# EAGLE board v1.4 (EAGLE 6.0)
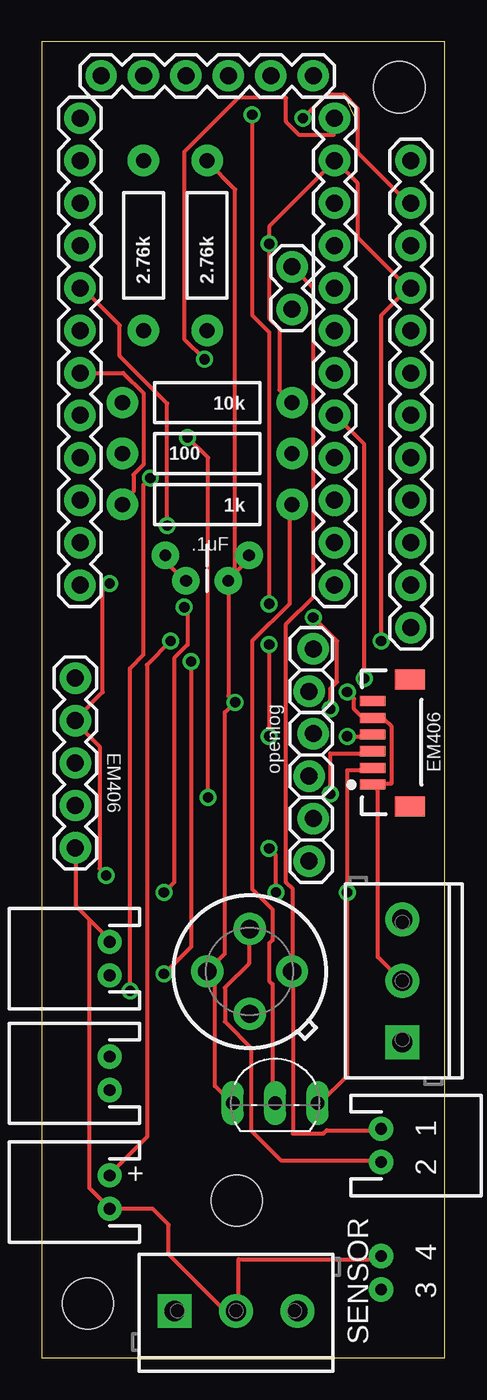
[diagram p0: board, top side]
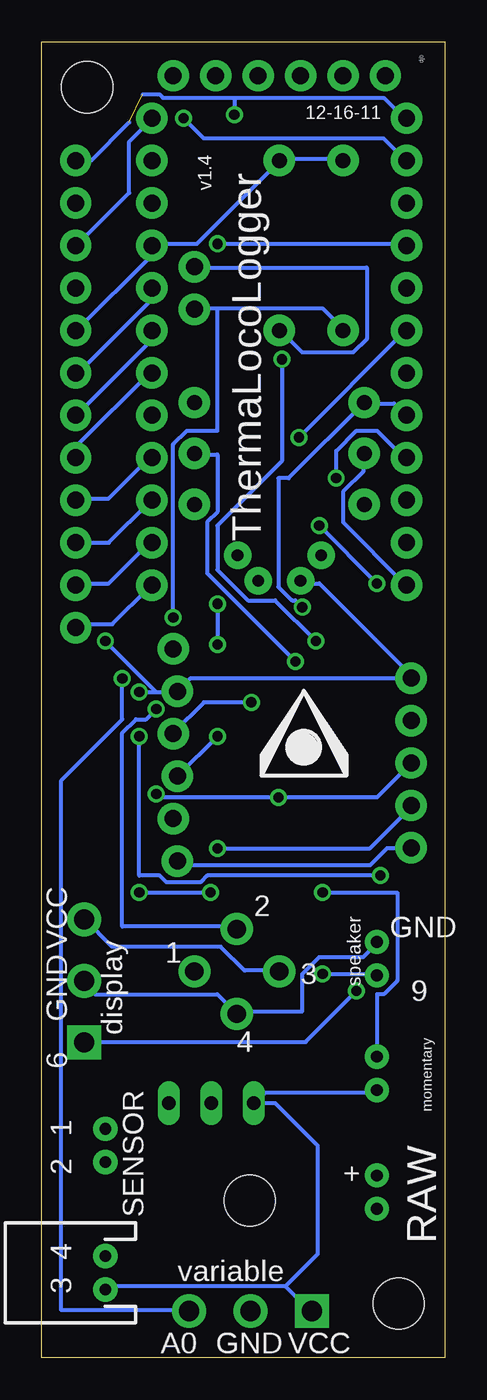
[diagram p1: board, bottom side, seen from below]

Size 24.13 x 78.74 mm. Coordinates in mm from the lower left corner, seen from the top.
Outline: 0,0 24.13,0 24.13,78.74 0,78.74 0,0
Copper layers (1*16): Top 0.035mm / dielectric 1.5mm / Bottom 0.035mm
Design rules: minimum track width 10mil, minimum drill 24mil, track to track 8mil, track to pad 8mil, pad to pad 8mil, via to via 8mil, smd to smd 8mil, copper to edge 40mil, drill to drill 8mil, minimum pad ring 10mil, minimum via ring 8mil, stop-mask expansion 4mil, vias tented up to drill 0mil, thermal gap 10mil

## Footprints (pad centres in the part's own frame; a part is rotated, then mirrored left to right if it is on the bottom)
TO92-EBC = drill 0.813 long: B 0,-1.27; C 2.54,-1.27; E -2.54,-1.27
CAP-PTH-SMALL = drill 0.7 pad 1.651: 1 0,0; 2 2.54,0
CAP-PTH-5MM = drill 0.7 pad 1.651: 1 -2.5,0; 2 2.5,0
SCREWTERMINAL-3.5MM-3_LOCK.007S = drill 1.2 pad 2.032 square: 1 -0.178,0 | drill 1.2 pad 2.032: 2 3.5,0; 3 7.178,0
1X05 = drill 1.016 pad 1.88: 1 0,0; 2 2.54,0; 3 5.08,0; 4 7.62,0; 5 10.16,0
JST-2-PTH = drill 0.7 pad 1.448: 1 -1,0; 2 1,0
1X06 = drill 1.016 pad 1.88: 1 0,0; 2 2.54,0; 3 5.08,0; 4 7.62,0; 5 10.16,0; 6 12.7,0
1X02 = drill 1.016 pad 1.88: 1 0,0; 2 2.54,0
STAND-OFF-TIGHT = hole 3.048: 0,0
1X06_LOCK = drill 1.016 pad 1.88: 1 0,0; 2 2.54,-0.254; 3 5.08,0; 4 7.62,-0.254; 5 10.16,0; 6 12.7,-0.254
1X12 = drill 1.016 pad 1.88: 1 0,0; 2 2.54,0; 3 5.08,0; 4 7.62,0; 5 10.16,0; 6 12.7,0; 7 15.24,0; 8 17.78,0; 9 20.32,0; 10 22.86,0; 11 25.4,0; 12 27.94,0
AXIAL-0.4 = drill 0.9 pad 1.88: P$1 -5.08,0; P$2 5.08,0
TO-39 = drill 1.1 pad 1.93: 1 2.54,0; 2 0,2.54; 3 -2.54,0; 4 0,-2.54
EM406 = smd 0.6 x 1.55: 1 0,0; 2 1,0; 3 2,0; 4 3,0; 5 4,0; 6 5,0 | smd 1.2 x 1.8: P$1 -1.3,-2.225; P$2 6.3,-2.225

## Placement (x,y rotation side)
2N3906  T1  [TO92-EBC]  13.97,16.51 0 top
C1  .1uF  [CAP-PTH-SMALL]  11.18,46.48 180 top
C3  .1u  [CAP-PTH-5MM]  9.91,48.01 180 top
DISPLAY  DSP  [SCREWTERMINAL-3.5MM-3_LOCK.007S]  21.59,19.05 90 top
GPS  EM406  [1X05]  2.01,30.51 90 top
JP1  Power  [JST-2-PTH]  4.06,9.91 90 top
JP2  Variable  [SCREWTERMINAL-3.5MM-3_LOCK.007S]  8.13,2.79 0 top
JP3  Momentary  [JST-2-PTH]  4.06,17.02 90 top
JP4  FTDI  [1X06]  16.26,76.71 180 top
JP5  A4A5  [1X02]  14.99,62.74 90 top
JP6  STAND-OFFTIGHT  [STAND-OFF-TIGHT]  2.77,3.25 0 top
JP7  STAND-OFFTIGHT  [STAND-OFF-TIGHT]  21.41,76.02 0 top
JP8  STAND-OFFTIGHT  [STAND-OFF-TIGHT]  11.68,9.4 90 top
JP10  SPK  [JST-2-PTH]  4.06,23.88 90 top
OPENLOG  OPENLOG  [1X06_LOCK]  16,29.72 90 top
PML  M12PTH  [1X12]  2.29,46.23 90 top
PMLB  M12PTH  [1X12]  22.1,71.63 270 top
PMR  M12PTH  [1X12]  17.53,74.17 270 top
R1  2.76k  [AXIAL-0.4]  9.91,66.55 90 top
R2  2.76k  [AXIAL-0.4]  6.1,66.55 90 top
R3  10k  [AXIAL-0.4]  9.91,57.15 180 top
R4  100  [AXIAL-0.4]  9.91,54.1 0 top
R5  1k  [AXIAL-0.4]  9.91,51.05 180 top
SEN1  34  [JST-2-PTH]  20.32,5.08 90 bottom
SEN2  12  [JST-2-PTH]  20.32,12.7 270 top
U1  MLX90614_  [TO-39]  12.45,23.11 0 top
U2  EM406  [EM406]  19.81,34.29 90 top

## Library data of the parts
2N3906 = transistor-neu-to92
C1 C3 DISPLAY GPS JP1-JP8 JP10 OPENLOG PML PMLB PMR R1-R5 SEN1 SEN2 U1 U2 = SparkFun

## Nets
GND: C1.2 C3.2 DISPLAY.2 GPS.1 GPS.5 JP1.1 JP2.2 JP10.2 OPENLOG.1 OPENLOG.5 PML.9 PMLB.4 PMR.2 R3.P$1 SEN1.2 U1.4 U2.1 U2.5
N$1: JP10.1 R4.P$2
N$2: JP5.1 R2.P$1 SEN2.2 U1.2
N$3: JP3.2 PML.5 R3.P$2
N$4: DISPLAY.1 PML.4
N$5: JP2.3 PMR.8
N$6: OPENLOG.3 PML.12 PMLB.1
N$8: PML.11 PMLB.2
N$9: PMLB.12 PMR.12
N$10: PMLB.11 PMR.11
N$11: PMLB.10 PMR.10
N$12: PMLB.9 PMR.9
N$13: PMLB.8 PMR.7
N$14: PMLB.7 PMR.6
N$15: PMLB.6 PMR.5
N$16: 2N3906.E C1.1 C3.1 DISPLAY.3 JP2.1 JP3.1 OPENLOG.4 PMLB.5 PMR.4 R1.P$2 R2.P$2 SEN1.1 U1.3
N$17: PML.1 R4.P$1
N$18: 2N3906.B R5.P$1
N$19: 2N3906.C GPS.2 U2.2
N$20: GPS.4 PML.8 U2.4
N$21: GPS.3 PML.7 U2.3
N$22: PML.6 R5.P$2
SENSOR: JP5.2 R1.P$1 SEN2.1 U1.1
VCC: JP1.2 PMLB.3 PMR.1

## Tracks (layer width: path | path; a pad name or v marks a point on that pad's centre or on a via)
GND  (via drill 0.61)
  Top 0.254: R3.P$1 14.22,57.91 14.22,61.57 13.61,62.18 v13.61,66.65 13.61,67.67 17.48,71.53 PMR.2 17.68,71.53 18.9,70.31 18.9,67.06 21.95,64.01 | C1.2 8.53,46.53 7.52,47.55 7.52,47.95 C3.2 | 4.06,8.74 JP1.1 | 20.32,6.1 SEN1.2 20.32,5.89 11.79,5.89 11.79,2.85 JP2.2 11.58,2.85 10.95,2.85 7.59,6.2 7.59,7.95 6.63,8.91 4.07,8.91 JP1.1 | 2.85,26.21 2.03,27.03 2.03,30.48 GPS.1 | 2.85,26.21 4.06,24.99 JP10.2 | DISPLAY.2 21.54,22.55 20.12,23.98 20.12,33.93 19.91,34.14 U2.1 19.91,34.34 20.93,34.34 20.93,37.8 20.52,38.2 19.91,38.2 U2.5 19.71,38.41 19.1,38.41 18.69,38.81 18.69,39.42 v18.29,39.83 | 2.85,26.21 2.85,10.16 4.06,8.94 JP1.1 | 21.95,64.01 20.32,62.38 v20.32,42.88 | 21.95,64.01 PMLB.4
  Bottom 0.254: v13.61,66.65 2.44,66.65 PML.9 | C1.2 8.53,46.33 7.52,46.33 2.03,40.84 GPS.5 2.03,40.64 15.24,40.64 OPENLOG.5 16.05,39.83 17.27,39.83 | OPENLOG.1 15.85,29.67 15.65,29.46 4.47,29.46 3.45,30.48 2.03,30.48 GPS.1 | DISPLAY.2 21.54,22.35 20.93,21.74 13.61,21.74 U1.4 12.39,20.73 8.53,20.73 8.53,22.96 7.52,23.98 4.88,23.98 4.06,24.79 JP10.2 | v18.29,39.83 17.27,39.83 | 17.27,39.83 v20.32,42.88
N$1  (via drill 0.61)
  Top 0.254: v7.32,22.96 8.94,24.59 v8.94,41.66
  Bottom 0.254: v7.32,22.96 4.06,22.96 JP10.1 | v8.94,41.66 14.22,46.94 14.22,49.99 13.61,50.6 13.61,54.05 14.83,54.05 R4.P$2
N$2  (via drill 0.61)
  Top 0.254: SEN2.2 20.32,11.79 14.35,11.79 12.57,13.56 12.57,18.47 12.6,18.49 10.97,20.12 10.97,22.15 12.39,23.57 12.39,25.6 U1.2 | v16.26,44.3 17.68,42.88 17.68,40.44 17.27,40.03 v17.27,38.81
  Bottom 0.254: 13.61,62.79 14.83,62.79 JP5.1 | 13.61,62.79 7.32,62.79 6.1,61.57 R2.P$1 | 13.61,62.79 13.61,55.47 15.44,55.47 16.26,54.66 v16.26,44.3 | v17.27,38.81 17.88,38.2 18.49,38.2 19.3,37.39 19.3,25.81 12.6,25.81 U1.2
N$3  (via drill 0.61)
  Top 0.254: v7.32,27.84 7.92,28.45 7.92,41.86 8.74,42.67 8.74,44.7 v8.53,44.91
  Bottom 0.254: JP3.2 4.06,21.74 3.66,21.74 2.85,22.55 2.85,27.84 v7.32,27.84 | v8.53,44.91 8.94,45.31 9.14,45.31 9.96,46.13 9.96,52.63 9.35,52.63 R3.P$2 4.67,57.1 3.05,57.1 2.44,56.49 PML.5
N$4  (via drill 0.61)
  Top 0.254: v6.5,52.63 6.1,52.22 6.1,42.06 5.28,41.25 v5.28,21.95
  Bottom 0.254: v6.5,52.63 6.5,54.25 5.28,55.47 4.06,55.47 2.44,53.85 PML.4 | v5.28,21.95 8.33,18.9 21.54,18.9 DISPLAY.1
N$5  (via drill 0.61)
  Top 0.254: v19.3,40.64 19.3,54.66 17.68,56.29 PMR.8
  Bottom 0.254: v19.3,40.64 19.3,38.2 22.96,34.54 22.96,2.85 15.44,2.85 JP2.3
N$6  (via drill 0.61)  (1 unrouted)
  Top 0.254: v13.61,42.67 v13.61,37.19 | v13.61,45.11 13.61,61.37 12.6,62.38 v12.6,74.37
  Bottom 0.254: 12.6,75.39 16.87,75.39 17.07,75.59 18.09,75.59 | 12.6,75.39 3.66,75.39 2.44,74.17 PML.12 | v13.61,37.19 OPENLOG.3 | v13.61,45.11 v13.61,42.67 | 12.6,75.39 v12.6,74.37 | PMLB.1 21.18,71.63 18.9,73.91
N$8  (via drill 0.61)
  Top 0.254: v15.65,74.17 17.07,75.59 18.09,75.59 18.9,74.78 18.9,72.14 21.95,69.09 PMLB.2
  Bottom 0.254: v15.65,74.17 14.43,72.95 3.66,72.95 2.44,71.73 PML.11
N$9
  Bottom 0.254: PMR.12 17.68,46.13 19.91,43.89 21.74,43.89 21.95,43.69 PMLB.12
N$10
  Bottom 0.254: PMR.11 17.68,48.77 20.12,46.33 21.95,46.33 PMLB.11
N$11
  Bottom 0.254: PMLB.10 20.12,48.77 17.68,51.21 PMR.10
N$12
  Bottom 0.254: PMR.9 17.68,53.85 20.12,51.41 21.95,51.41 PMLB.9
N$13
  Bottom 0.254: PMR.7 17.68,58.93 21.95,54.66 21.95,53.85 PMLB.8
N$14
  Bottom 0.254: PMLB.7 21.95,56.49 17.68,60.76 17.68,61.37 PMR.6
N$15
  Bottom 0.254: PMLB.6 21.95,58.93 17.68,63.2 17.68,64.01 PMR.5
N$16  (via drill 0.61)
  Top 0.254: 11.58,46.94 12.39,47.75 12.39,47.95 C3.1 | 11.58,46.94 11.18,46.53 C1.1 | C1.1 11.18,39.62 v11.58,39.22 10.97,38.61 10.97,24.18 U1.3 9.96,22.96 10.36,22.55 10.36,16.26 11.38,15.24 2N3906.E | 11.58,46.94 11.58,69.9 9.96,71.53 R1.P$2 | 11.58,46.94 C1.1
  Bottom 0.254: R2.P$2 6.1,71.73 9.75,71.73 R1.P$2 9.96,71.53 14.83,66.65 17.48,66.65 PMR.4 17.68,66.45 17.68,65.84 21.95,61.57 PMLB.5 | v11.58,39.22 14.43,39.22 16.26,37.39 OPENLOG.4 | 9.55,4.27 20.32,4.27 SEN1.1 | 9.55,4.27 8.13,2.85 JP2.1 | 11.38,15.24 10.77,15.85 4.06,15.85 JP3.1 | 11.38,15.24 2N3906.E | DISPLAY.3 21.54,26.21 19.91,24.59 13.41,24.59 11.99,23.16 9.96,23.16 U1.3 | 11.38,15.24 10.16,15.24 7.62,12.7 7.62,6.2 9.55,4.27
N$17
  Bottom 0.254: PML.1 2.44,46.33 6.1,49.99 6.1,51.82 4.88,53.03 4.88,54.05 R4.P$1
N$18
  Top 0.254: 2N3906.B 13.82,15.24 13.82,22.35 13.61,22.55 13.61,24.79 13.82,24.99 13.82,26.82 12.6,28.04 12.6,42.88 14.83,45.11 14.83,51 R5.P$1
N$19  (via drill 0.61)
  Top 0.254: U2.2 19.71,35.15 18.29,35.15 v18.29,27.84 18.29,16.87 16.66,15.24 2N3906.C | v13.61,30.48 14.02,30.07 v14.02,27.84
  Bottom 0.254: v13.61,30.48 4.47,30.48 2.03,32.92 GPS.2 | v18.29,27.84 v14.02,27.84
N$20  (via drill 0.61)
  Top 0.254: v18.29,37.19 19.71,37.19 U2.4 | v3.86,28.85 3.45,29.26 3.45,36.58 2.03,38 GPS.4 2.03,38.2 3.66,39.83 3.66,45.92 v4.06,46.33 | v7.52,49.78 7.52,57.1 4.67,59.94 4.67,61.77 2.44,64.01 PML.8
  Bottom 0.254: v18.29,37.19 18.29,28.85 17.07,28.85 16.66,28.45 14.63,28.45 14.22,28.85 v3.86,28.85 | v4.06,46.33 v7.52,49.78
N$21  (via drill 0.61)
  Top 0.254: v17.27,33.73 17.27,36.17 19.71,36.17 U2.3 | v8.74,55.07 9.96,53.85 v9.96,33.53
  Bottom 0.254: v17.27,33.73 17.07,33.53 v9.96,33.53 4.06,33.53 GPS.3 | v8.74,55.07 2.44,61.37 PML.7
N$22
  Top 0.254: PML.6 4.88,58.93 6.1,57.71 6.1,53.44 5.49,52.83 5.49,51.82 4.88,51.21 R5.P$2
SENSOR
  Top 0.254: SEN2.1 20.32,13.61 17.07,13.61 16.87,13.41 15.04,13.41 15.04,22.96 U1.1 15.04,23.16 15.04,28.04 14.63,28.45 14.63,43.89 16.26,45.52 16.26,64.01 JP5.2
  Bottom 0.254: R1.P$1 9.75,61.37 8.53,60.15 5.49,60.15 4.67,60.96 4.67,65.23 14.83,65.23 JP5.2
VCC  (via drill 0.61)
  Top 0.254: v7.72,42.88 6.3,41.45 6.3,13.21 4.06,10.97 JP1.2 | v9.75,59.74 8.53,60.96 8.53,72.14 11.79,75.39 14.63,75.39 14.63,73.97 15.44,73.15 17.48,73.15 17.48,74.17 PMR.1
  Bottom 0.254: v7.72,42.88 10.16,45.31 11.79,45.31 13.61,47.14 13.61,49.78 9.75,53.65 v9.75,59.74 | PMLB.3 21.95,66.65 18.9,69.7 18.9,72.77 17.59,74.08 | 17.59,74.08 17.5,74.17 | 17.59,74.08 17.68,74.17 PMR.1

## Text on the board
tPlace: .1uF | openlog | EM406 | EM406 | 1 | 2 | + | SENSOR | 4 | 3
bPlace: djb | 12-16-11 | v1.4 | ThermaLocoLogger | VCC | speaker | 2 | GND | 1 | GND | 3 | 9 | display | 4 | 6 | SENSOR | momentary | 1 | RAW | 2 | + | 4 | variable | 3 | VCC | GND | A0